# Altium PCB 日全世界.PcbDoc
Units mil, origin at the board's own origin, x right, y up, seen from the top; angles counter-clockwise.
Board outline 1906 x 1421 mil, 2 copper layers (Top Layer, Bottom Layer); 48 components, 40 nets, 175 pads, 45 vias.
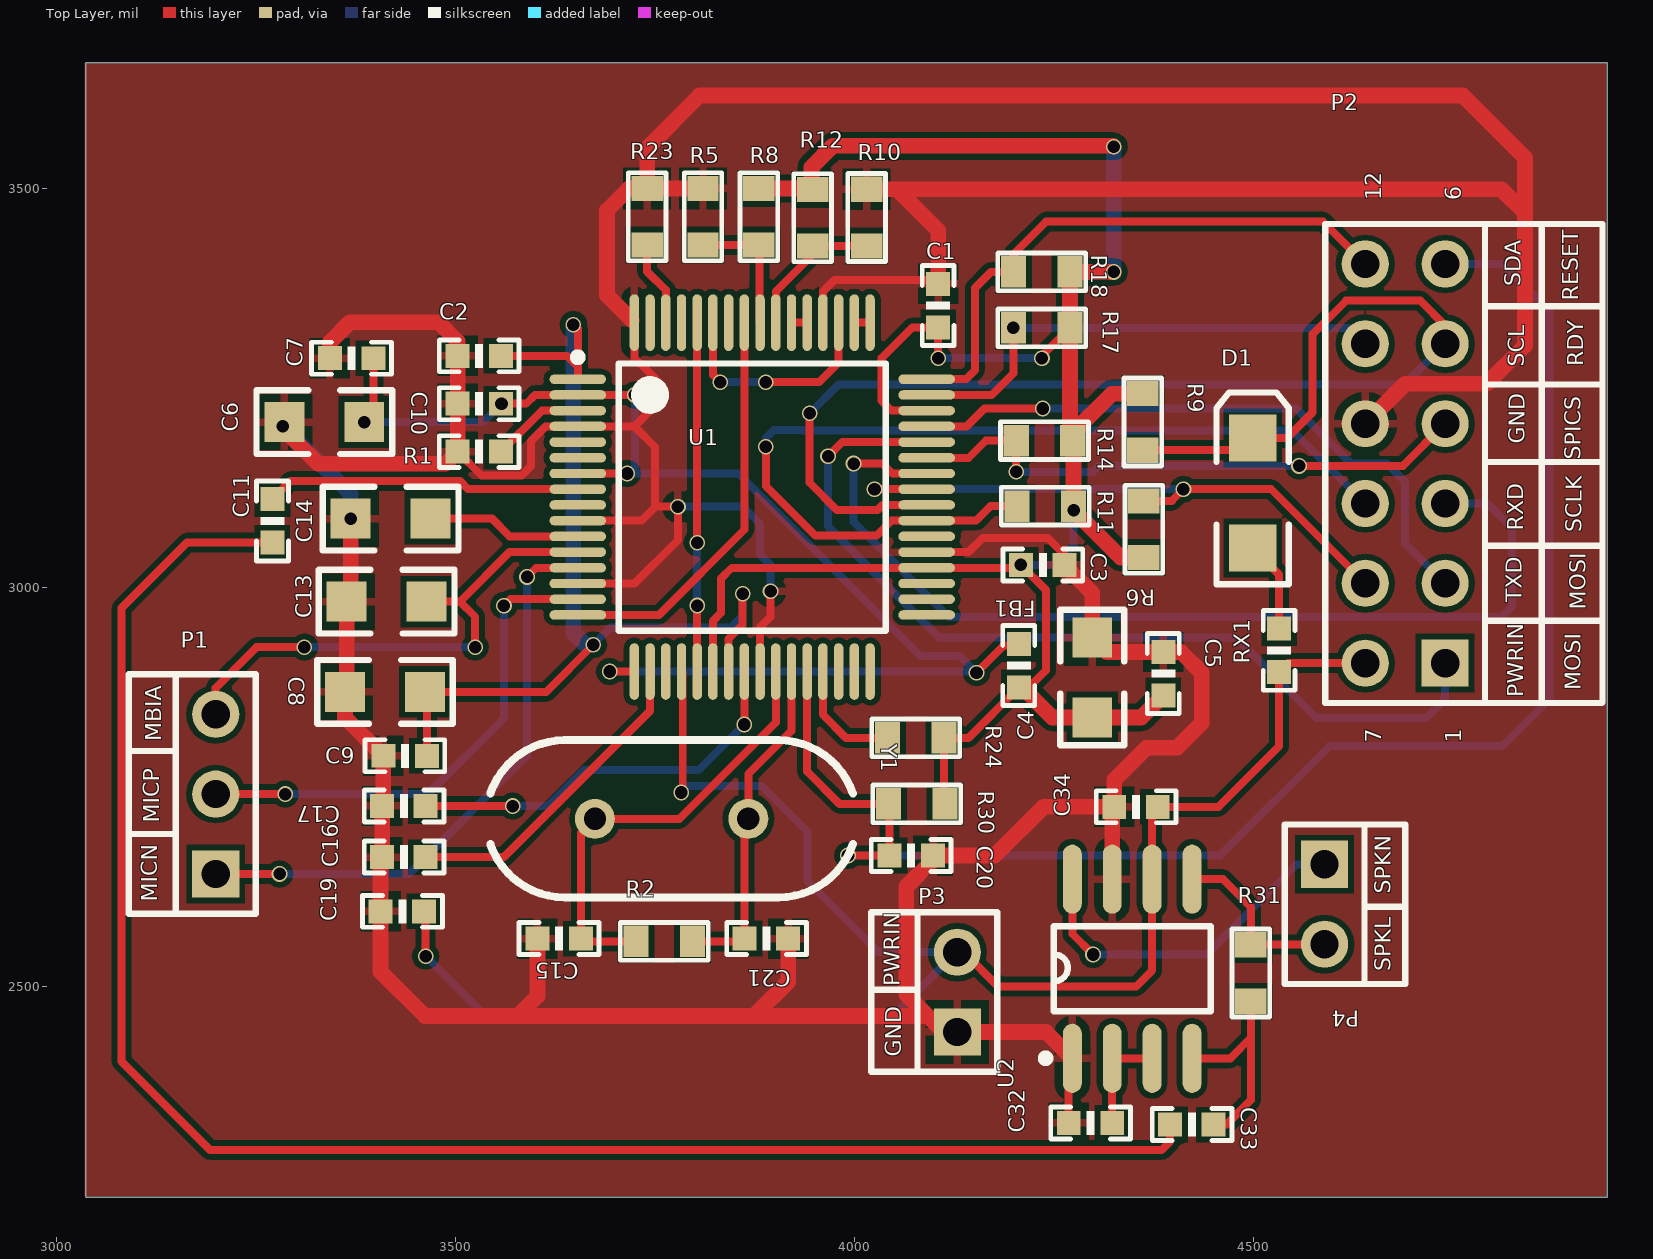
[diagram p0: Top Layer view]
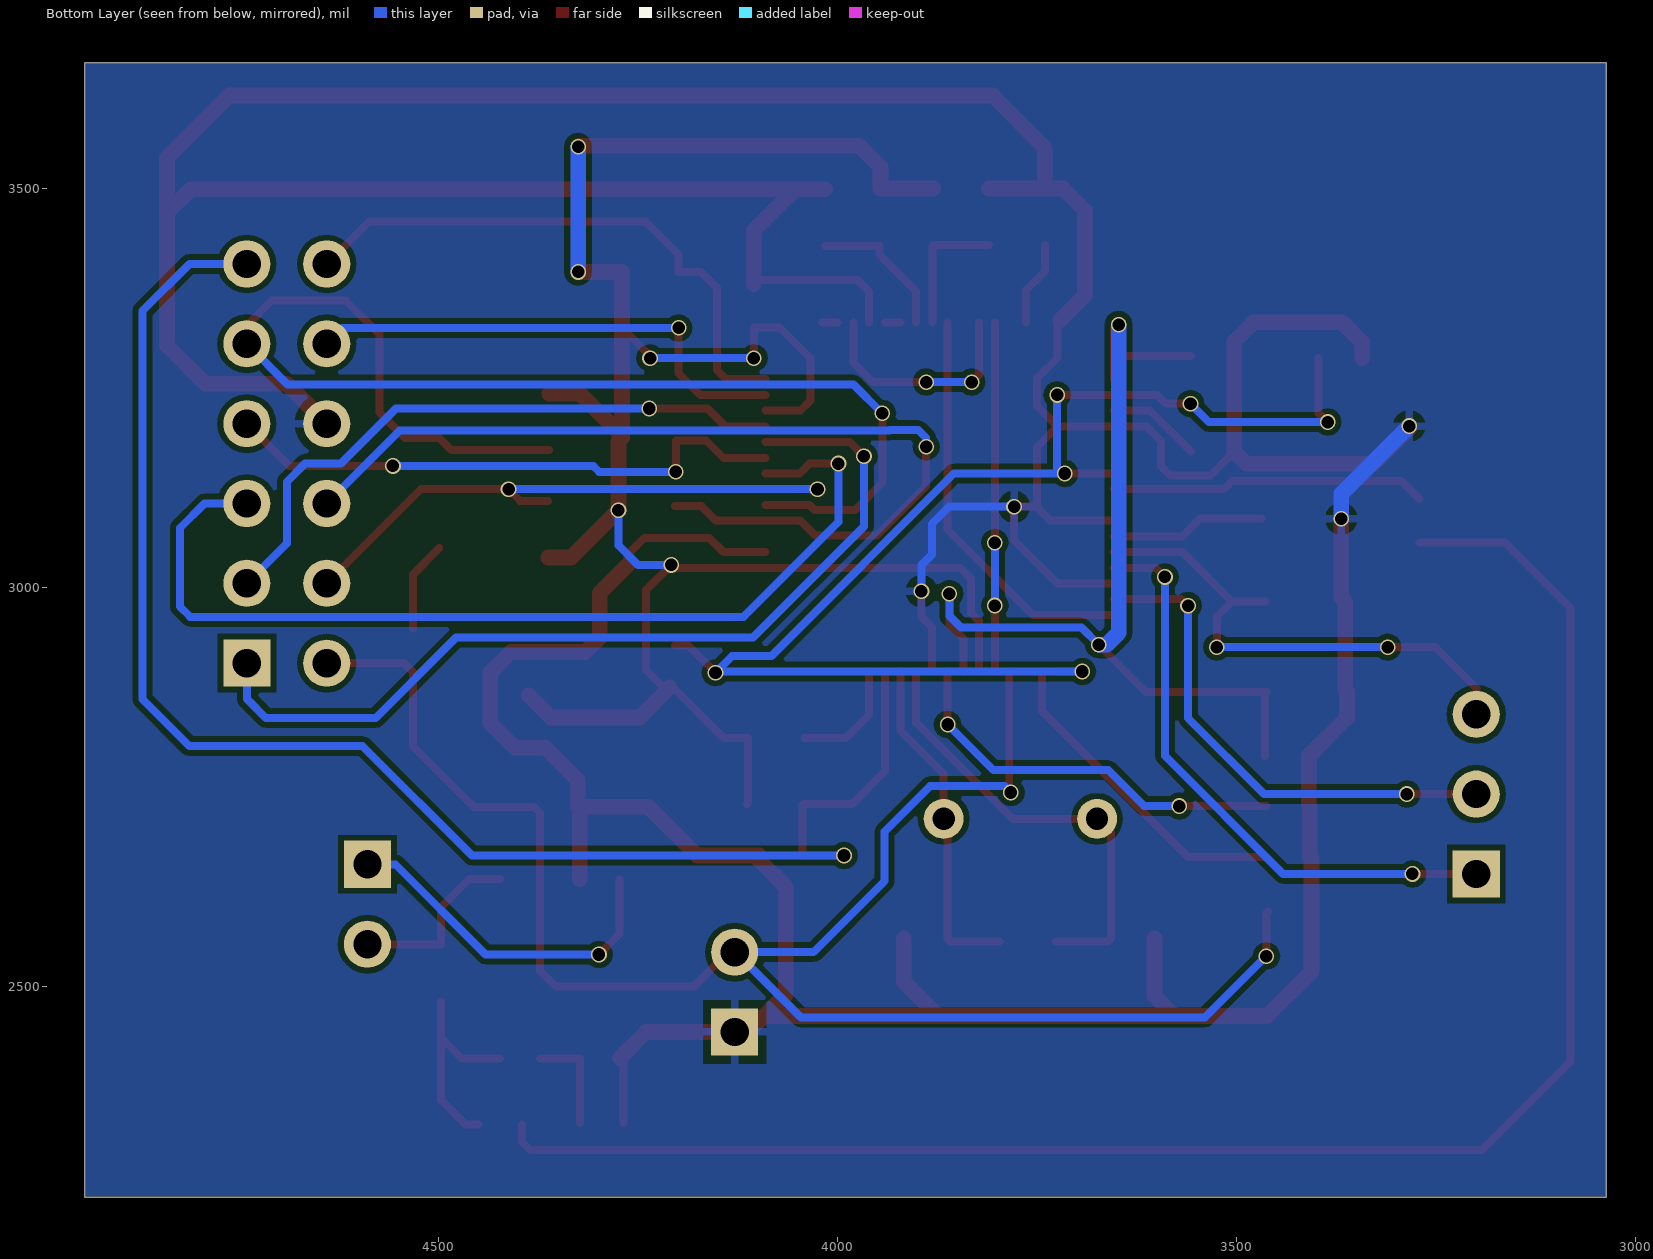
[diagram p1: Bottom Layer view, seen from below]

## Layer stack, top to bottom
Top Layer: signal copper 1.4
Dielectric: dielectric 12.6, FR-4, Dk 4.8
Bottom Layer: signal copper 1.4

## Board outline
3037,2236 3037,3657 4943,3657 4943,2236

## Design rules (kind name [scope] priority, off if disabled: settings)
Clearance [All] p1: gap=7
HoleToHoleClearance [All] p1: gap=5 allowstackedmicrovias=TRUE
MinimumSolderMaskSliver [All] p1: minsoldermaskwidth=5
PolygonConnect [All] p1: connectstyle=Relief reliefconductorwidth=10 reliefentries=4 polygonreliefangle="90 Angle" airgapwidth=10
RoutingVias [All] p1: holewidth=28 width=50 viastyle="Through Hole" minholewidth=11.81 minwidth=19.68 maxholewidth=28 maxwidth=50
SilkToSilkClearance [All] p1: silktosilkclearance=5
SolderMaskExpansion [All] p1: expansion=4
Width [All] p1: maxlimit=78.74 minlimit=10 preferedwidth=10
25 further rules are at their usual default settings.

## Components (designator, comment, footprint, x,y, rotation, side; value= is the part's Value field where it differs from the comment)
C1 "0.1uF" 0603P 4105,3353 r270 top
C2 "0.1uF" 0603P 3530,3290 r0 top
C3 "0.1uF" 0603P 4236,3028 r180 top
C4 "10uF" 0805 4298,2887 r90 top
C5 "0.1uF" 0603P 4387,2892 r270 top
C6 "10uF" 0805 3336,3207 r180 top
C7 "0.1uF" 0603P 3370,3287 r0 top
C8 "10uF" 0805 3412,2869 r180 top
C9 "0.1uF" 0603P 3437,2789 r0 top
C10 "0.1uF" 0603P 3530,3230 r0 top
C11 "1uF" 0603P 3271,3083 r90 top
C13 "10uF" 0805 3414,2982 r180 top
C14 "10uF" 0805 3419,3086 r180 top
C15 "27pF" 0603P 3630,2560 r0 top
C16 "0.1uF" 0603P 3436,2662 r180 top
C17 "1uF" 0603P 3436,2726 r180 top
C19 "0.1uF" 0603P 3434,2594 r180 top
C20 "10uF" 0603P 4071,2664 r0 top
C21 "27pF" 0603P 3890,2560 r180 top
C32 "105" 0603P 4296,2329 r180 top
C33 "104" 0603P 4423,2327 r180 top
C34 "104" 0603P 4353,2725 r180 top
D1 "LED2" 3.2X1.6X1.1 4499,3118 r90 top
FB1 "100M/600R" 0603P 4206,2902 r270 top
P1 "Header 3" HDR1X3 3200,2641 r90 top
P2 "Header 6X2A" HDR2X6_CEN 4740,2905 r90 top
P3 "Header 2" HDR1X2 4129,2443 r90 top
P4 "Header 2" HDR1X2 4589,2653 r270 top
R1 "10K" 0603P 3530,3170 r0 top
R2 "4.7M" R0603 3815,2580 r0 top
R5 "10K" R0603 3834,3411 r270 top
R6 "10K" R0603 4339,3126 r90 top
R8 "10K" R0603 3904,3411 r270 top
R9 "10K" R0603 4385,3154 r270 top
R10 "10K" R0603 4039,3410 r270 top
R11 "10K" R0603 4186,3078 r180 top
R12 "10K" R0603 3924,3516 r90 top
R14 "10K" R0603 4185,3160 r180 top
R17 "10K" R0603 4181.42,3301.38 r180 top
R18 "10K" R0603 4181.42,3371.38 r180 top
R23 "10K" R0603 3764,3411 r270 top
R24 "10K" R0603 4130,2835 r0 top
R30 "10K" R0603 4025,2705 r180 top
R31 "22K" R0603 4473,2570 r90 top
RX1 "1K" 0603P 4532,2921 r90 top
U1 "XFS5152CE" LQFP64_N 3872,3113 r0 top
U2 "HXJ8002" SOP-8 4273,2410 r90 top
Y1 "12M" XTAL_US 3675,2710 r0 top

## Footprints (in the part's own frame and the unit in brackets; to place one, negate y for a bottom-side part, rotate by r counter-clockwise, add the part's x,y. Pads: shape width x height; smd on the part's side, far side on the other; paste and mask are expansions set on the pad)
3.2X1.6X1.1 [mm] "SMT LED; 2 Flat Leads"
  rect 1.5x1.5 smd: 1(-1.75,0) 2(1.75,0)
  silkscreen extent -2.9,-1.15 3.2,1.15
0603P [mil]
  rect 30x30 smd: 1(-27,0) 2(27.5,-0.06)
  silkscreen extent -50,-20 50,20
0805 [mil]
  rect 50x50 smd: 1(-50,0) 2(50,0)
  silkscreen extent -85,-40 85,40
HDR1X2 [mm] "Connector; Header; 2 Position"
  rect 1.5x1.5 hole 0.9: 1(0,0)
  round 1.5 hole 0.9: 2(2.54,0)
  silkscreen extent -1.27,-1.27 3.81,1.27
HDR1X3 [mm] "Connector; Header; 3 Position"
  rect 1.5x1.5 hole 0.9: 1(0,0)
  round 1.5 hole 0.9: 2(2.54,0) 3(5.08,0)
  silkscreen extent -1.27,-1.27 6.35,1.27
HDR2X6_CEN [mm] "Connector; Header; 6x2 Position"
  rect 1.5x1.5 hole 0.9: 1(0,0)
  round 1.5 hole 0.9: 2(2.54,0) 3(5.08,0) 4(7.62,0) 5(10.16,0) 6(12.7,0) 7(0,2.54) 8(2.54,2.54) 9(5.08,2.54) 10(7.62,2.54) 11(10.16,2.54) 12(12.7,2.54)
  silkscreen extent -1.27,-1.27 13.97,3.81
LQFP64_N [mm] "Thin QFP, 64-Leads, Body 10x10mm, Pitch 0.5mm, IPC Medium Density"
  oval 1.8x0.3 smd: 1(-5.55,3.75) 2(-5.55,3.25) 3(-5.55,2.75) 4(-5.55,2.25) 5(-5.55,1.75) 6(-5.55,1.25) 7(-5.55,0.75) 8(-5.55,0.25) 9(-5.55,-0.25) 10(-5.55,-0.75) 11(-5.55,-1.25) 12(-5.55,-1.75) 13(-5.55,-2.25) 14(-5.55,-2.75) 15(-5.55,-3.25) 16(-5.55,-3.75) 33(5.55,-3.75) 34(5.55,-3.25) 35(5.55,-2.75) 36(5.55,-2.25) 37(5.55,-1.75) 38(5.55,-1.25) 39(5.55,-0.75) 40(5.55,-0.25) 41(5.55,0.25) 42(5.55,0.75) 43(5.55,1.25) 44(5.55,1.75) 45(5.55,2.25) 46(5.55,2.75) 47(5.55,3.25) 48(5.55,3.75)
  oval 0.3x1.8 smd: 17(-3.75,-5.55) 18(-3.25,-5.55) 19(-2.75,-5.55) 20(-2.25,-5.55) 21(-1.75,-5.55) 22(-1.25,-5.55) 23(-0.75,-5.55) 24(-0.25,-5.55) 25(0.25,-5.55) 26(0.75,-5.55) 27(1.25,-5.55) 28(1.75,-5.55) 29(2.25,-5.55) 30(2.75,-5.55) 31(3.25,-5.55) 32(3.75,-5.55) 49(3.75,5.55) 50(3.25,5.55) 51(2.75,5.55) 52(2.25,5.55) 53(1.75,5.55) 54(1.25,5.55) 55(0.75,5.55) 56(0.25,5.55) 57(-0.25,5.55) 58(-0.75,5.55) 59(-1.25,5.55) 60(-1.75,5.55) 61(-2.25,5.55) 62(-2.75,5.55) 63(-3.25,5.55) 64(-3.75,5.55)
  silkscreen extent -5.67,-4.25 4.25,4.57, body extent -5,-5 5,5, height 1.6
R0603 [mm]
  rect 0.8x1 smd: 1(-2.25,-0.6) 2(-0.45,-0.6)
  silkscreen extent -2.75,-1.2 0.05,0
SOP-8 [mm]
  oval 2.2x0.6 smd: 1(0,0) 2(0,-1.27) 3(0,-2.54) 4(0,-3.81) 5(5.7,-3.81) 6(5.7,-2.54) 7(5.7,-1.27) 8(5.7,0)
  silkscreen extent -0.12,-4.41 4.2,0.97
XTAL_US [mil]
  round 50 hole 28: 1(0,0) 2(192.13,0)
  silkscreen extent -131,-98 323,98

## Part data
C1 C2 C3 C5 C7 C9 C10 C11 C15 C21 C32 C33 C34: library part "Cap NP", "电容"
C4 C6 C8 C13 C14 C20: library part "CAP POL"
C16 C17 C19: library part CAP, "Capacitor"
D1: "Typical RED, GREEN, YELLOW, AMBER GaAs LED"
FB1: library part Fbead, "磁珠"
P1: "Header, 3-Pin"
P2: "Header, 6-Pin, Dual row"
P3 P4: "Header, 2-Pin"
R1 R6 R9 R11 R14 R17 R18 R23 R24 R30 R31: library part Res2, "Resistor"
R2 R5 R8 R10 R12: library part RES2, "电阻"
RX1: library part R
U1: library part XFS5152-2
Y1: library part XTAL1, "晶振"

## Via types
v1: diameter 19.68, hole 15.75, Top Layer to Bottom Layer, 45 vias

## Nets (pads, with @x,y where several pads share a name; then routed paths per layer and width w, separated by ;. In a path a pad name is that pad's centre, name@x,y a point inside that pad or via, vN(x,y) a via of type N, cw(c..) or ccw(c..) an arc to the next point about the centre after c; other vN are vias at no path point)
12MI: C15.2 R2.1 U1.26 Y1.1 | length 568.1
  Top Layer w10: R2.1 3661.06,2556.38 C15.2 3657.5,2692.5 Y1.1 3780.89,2710 3901.53,2830.64 U1.26
12MO: C21.2 R2.2 U1.27 Y1.2 | length 425.5
  Top Layer w10: R2.2 3858.81,2556.38 C21.2 3862.5,2705.37 Y1.2 3867.13,2766.13 3921.21,2820.21 U1.27
A3: R23.2 U1.62 | length 106.9
  Top Layer w10: R23.2 3740.38,3395.62 3763.73,3372.27 U1.62
A4: R24.1 U1.29 | length 146.9
  Top Layer w10: U1.29 3960.58,2840.42 3989.62,2811.38 R24.1
ADAC0: C11.1 C33.2 | length 2176.4
  Top Layer w10: C11.1 3164,3056 3082,2974 3082,2406 3193,2295 4385,2295 4395.5,2305.5 C33.2
AVDD12: C17.1 U1.24 | length 507.8
  Top Layer w10: C17.1 v1(3572,2726) ; v1(3862.16,2828.16) U1.24
  Bottom Layer w10: v1(3572,2726) 3616,2726 3661,2771 3805,2771 v1(3862.16,2828.16)
AVDD33: C6.1 C7.2 C10.2 FB1.1 U1.2 U1.7 U1.17 | length 1689.1
  Top Layer w10: v1(3386,3207) 3397.5,3218.5 C7.2 ; C10.2 3588.94,3229.94 3599.95,3240.95 U1.2 v1(3724.95,3240.95) ; U1.7 v1(3715.47,3142.53) ; v1(3693.5,2894.5) U1.17 ; v1(4153,2893) 4187,2927 FB1.1@4204,2927
  Bottom Layer w10: v1(3386,3207) 3535,3207 v1(3558,3230) ; v1(3693.5,2894.5) v1@4151.5,2894.5 ; v1(3715.47,3142.53) 3854.47,3142.53 4083,2914 4132,2914 v1@4151.5,2894.5 ; 3724.95,3146.95 v1(3724.95,3240.95) ; v1(4153,2893) v1@4151.5,2894.5
BAUD1: R5.2 R8.2 U1.56 | length 167.2
  Top Layer w10: R5.2 R8.2 3881.38,3427.72 U1.56@3881.38,3331.97
BAUD2: R10.2 R12.1 U1.55 | length 182.9
  Top Layer w10: U1.55 3901.53,3370.53 3947.62,3416.62 R12.1 4015.08,3427.42 R10.2
D0: U1.16 U1.57 | length 512.2
  Top Layer w10: U1.16 3755.36,2965.36 3862.16,3072.16 U1.57
D1: U1.21 U1.60 | length 438.6
  Top Layer w10: U1.21 v1(3803.1,2977.1) ; v1(3803.1,3055.9) U1.60
  Bottom Layer w10: v1@3802,2976 v1(3803.1,2977.1) v1(3803.1,3055.9)
D2: U1.49 U1.50 | length 19.7
  Top Layer w10: U1.50 U1.49
D3: U1.51 U1.59 | length 291.1
  Top Layer w10: U1.59 3822.79,3266.21 v1(3832,3257) ; v1(3889,3257) 3956,3257 3980.27,3281.27 U1.51
  Bottom Layer w10: v1(3832,3257) v1(3889,3257) v1@3892,3254
GND: C1.1 C2.1 C3.1 C4.2 C5.1 C6.2 C7.1 C8.2 C9.1 C10.1 C13.2 C14.2 C15.1 C16.2 C17.2 C19.2 C20.2 C21.1 C32.2 C34.2 P2.10 P3.1 R1.1 R5.1 R10.1 R23.1 U1.4 U1.10 U1.14 U1.25 U1.37 U1.52 U1.64 U2.1 U2.7 | length 8119.8
  Top Layer w10: R1.1 3533.16,3139.84 3582.84,3139.84 3595,3152 3595,3183.39 3613.19,3201.58 U1.4 3724.42,3201.58 ; U1.14 3724.73,3004.73 3779,3059 v1(3779,3101) 3751,3101 3750,3100 ; U1.10 3733.47,3083.47 3750,3100 ; U1.64 3724.36,3287.64 3750,3262 3750,3227.17 3724.42,3201.58 ; U1.25 3881.84,2949.84 3895,2963 v1(3895,2995) ; U1.52 3960.58,3370.58 3975,3385 4100,3385 C1.1 ; U1.37 4143.1,3044.1 4161,3062 4242,3062 4263,3041 C3.1 ; C32.2 4268.5,2405.5 U2.1 ; 3724.42,3201.58 3750,3176 3750,3100
  Top Layer w19.68: v1(3284,3202) 3284,3199 3328.16,3154.84 3487.84,3154.84 R1.1 C10.1 C2.1 3503,3308 3479,3332 3368,3332 3343,3307 C7.1 ; v1(3369,3086) 3369,2987 C13.2 3364,2871 C8.2 3362,2837 C9.1 3410,2727.56 C17.2 C16.2 3406.5,2660.06 C19.2 3406.5,2518.5 3462,2463 3578,2463 ; C15.1 3603,2488 3578,2463 ; U1.64@3721.3,3334.57 3690,3365.87 3690,3472 3717.58,3499.58 R23.1 ; R5.1 R23.1 ; C21.1 3917,2506 3874,2463 ; R10.1 4053.42,3498.58 ; C1.1 4105,3447 4053.42,3498.58 ; C3.1 4298,2993 C4.2 4316,2919 C5.1 4409,2919 4435,2893 4435,2830 4404,2799 4366,2799 4325.5,2758.5 C34.2 ; U2.1 4240,2443 P3.1 4112,2443 4092,2463 ; U2.7 4323,2722.56 C34.2 ; P2.10 4690,3255 4792,3255 4840,3303 4840,3469 ; 3578,2463 3874,2463 ; R23.1 3740.38,3550.38 3806,3616 4762,3616 4840,3538 4840,3469 ; 3874,2463 4092,2463 ; 4053.42,3498.58 4810.42,3498.58 4840,3469 ; 4092,2463 4065,2490 4065,2625 4098.5,2658.5 C20.2 4175.94,2663.94 4237.06,2725.06 C34.2
  Bottom Layer w10: v1(3779,3101) 3860.38,3101 3881.84,3079.53 3881.84,3041.16 3895,3028 v1(3895,2995)
  Bottom Layer w19.68: v1(3284,3202) 3369,3117 v1(3369,3086)
IIC_SCL: P2.11 R17.2 U1.47 | length 625.9
  Top Layer w10: U1.47 4171.95,3240.95 4199.13,3268.13 v1(4199.13,3325)
  Bottom Layer w10: v1(4199.13,3325) 4620,3325 P2.11
IIC_SDA: P2.12 R18.2 U1.48 | length 726.5
  Top Layer w10: U1.48 4139.64,3260.64 4151,3272 4151,3375 4171,3395 R18.2 4199.13,3417.13 4240,3458 4587,3458 P2.12
MIC_BIAS: C13.1 P1.3 U1.12 | length 659.2
  Top Layer w10: P1.3 3200,2874 3251,2925 v1(3311,2925) ; C13.1 3506,2982 ; v1(3525,2925) 3525,2963 3506,2982 ; U1.12 3568.1,3044.1 3506,2982
  Bottom Layer w10: v1(3311,2925) v1(3525,2925)
MIC_N: P1.1 U1.13 | length 743.5
  Top Layer w10: P1.1 v1(3280,2641) ; v1(3590,3013) 3601.42,3024.42 U1.13
  Bottom Layer w10: v1(3280,2641) 3442,2641 3590,2789 v1(3590,3013)
MIC_P: P1.2 U1.15 | length 637.2
  Top Layer w10: P1.2 v1(3287,2741) ; v1(3561,2977) 3569.05,2985.05 U1.15
  Bottom Layer w10: v1(3287,2741) 3466,2741 3561,2836 v1(3561,2977)
NetC11_2: C11.2 U1.8 | length 396
  Top Layer w10: C11.2 3293.56,3133 3506,3133 3516.16,3122.84 U1.8
NetC14_1: C14.1 U1.11 | length 193.7
  Top Layer w10: C14.1 3546,3086 3568.21,3063.79 U1.11
NetC32_1: C32.1 U2.2 U2.3 | length 131
  Top Layer w10: C32.1 U2.2 U2.3
NetC33_1: C33.1 R31.1 U2.4 | length 267.3
  Top Layer w10: U2.4 4471,2410 4496.62,2435.62 ; C33.1 4466,2327 4496.62,2357.62 4496.62,2435.62 ; R31.1 4496.62,2435.62
NetD1_1: D1.1 RX1.2 | length 114.3
  Top Layer w10: D1.1 4532.06,3016.04 RX1.2
NetR1_2: R1.2 U1.3 | length 117.3
  Top Layer w10: R1.2 3608.83,3221.27 U1.3
NetU1_53: U1.53 U1.54 | length 19.7
  Top Layer w10: U1.54 U1.53
PWR_IN: C19.1 C34.1 P2.7 P3.2 RX1.1 U1.20 U2.6 | length 2279.5
  Top Layer w10: C19.1 3463,2592 v1(3463,2538) ; v1(3783,2743) 3785,2745 3785,2892.91 U1.20 ; P3.2 4137,2543 4180,2500 4353,2500 4373,2520 U2.6 4373,2718 C34.1 4456,2725 4532,2801 RX1.1 4543,2905 P2.7
  Bottom Layer w10: v1(3463,2538) 3540,2461 4046,2461 P3.2@4128,2543 ; v1(3783,2743) 3791,2751 3884,2751 3941,2694 3941,2632 4030,2543 P3.2@4128,2543 ; P3.2 P3.2@4128,2543
RDY: D1.2 P2.5 R9.2 U1.40 | length 1631.6
  Top Layer w10: v1(3944,3218) 3944,3131 3978,3097 4029,3097 4035.16,3103.16 U1.40 ; R9.2 4483.82,3171.72 D1.2 4541.9,3186.9 4574,3219 4574,3317 4616,3359 4709,3359 4740,3328 P2.5
  Bottom Layer w10: v1(3944,3218) 3980,3254 4689,3254 P2.5
RESET: C20.1 P2.6 R30.2 U1.28 | length 1962.8
  Top Layer w10: U1.28 3940.9,2769.1 3981.38,2728.62 R30.2 4044,2727.34 C20.1 v1(3992,2664)
  Bottom Layer w10: v1(3992,2664) 4458,2664 4595,2801 4812,2801 4871,2860 4871,3346 4812,3405 P2.6
RXD: P2.9 R11.2 U1.39 | length 1208.8
  Top Layer w10: v1(3889,3176) 3889,3127 3951,3065 4028,3065 4046.47,3083.47 U1.39 4152.47,3083.47 4170.62,3101.62 R11.2
  Bottom Layer w10: v1(3889,3176) 3889,3187 3899,3197 3934.11,3197 3934.95,3196.16 4548.84,3196.16 P2.9
SPI_CLK: P2.3 U1.42 | length 1244.2
  Top Layer w10: v1(3999,3155) 4035,3155 4047.47,3142.53 U1.42
  Bottom Layer w10: v1(3999,3155) 3999,3082 4118,2963 4811,2963 4824,2976 4824,3074 4793,3105 P2.3
SPI_CS: P2.4 R14.2 U1.43 | length 722.3
  Top Layer w10: U1.43 4143.21,3162.21 4164.62,3183.62 R14.2 v1(4202.72,3144.69) ; v1(4557,3152) 4687,3152 P2.4
  Bottom Layer w10: v1(4202.72,3144.69) 4298.69,3144.69 4306,3152 v1(4557,3152)
SPI_MISO: P2.2 U1.45 | length 794.6
  Top Layer w10: U1.45 4140.58,3201.58 4162.95,3223.95 v1(4235.95,3223.95)
  Bottom Layer w10: v1(4235.95,3223.95) 4553.05,3223.95 4622,3155 4667,3155 4690,3132 4690,3055 P2.2
SPI_MOSI: P2.1 U1.44 | length 1146.3
  Top Layer w10: v1(3967,3164) 3984.9,3181.9 U1.44
  Bottom Layer w10: v1(3967,3164) 3967,3076 4106,2937 4478,2937 4579,2836 4716,2836 4740,2860 P2.1
SPKL: P4.2 R31.2 U2.5 | length 226.9
  Top Layer w10: U2.5 4461.59,2634.41 4496.62,2599.38 R31.2 P4.2@4588.28,2552.28
SPKN: P4.1 U2.8 | length 442
  Top Layer w10: U2.8 4273,2566 v1(4299,2540)
  Bottom Layer w10: v1(4299,2540) 4441,2540 4554,2653 P4.1
TXD: P2.8 R6.2 U1.41 | length 784.6
  Top Layer w10: v1(4025.16,3122.84) U1.41 ; R6.2 4397.6,3108.28 v1(4412.16,3122.84) 4522.16,3122.84 P2.8
  Bottom Layer w10: v1(4025.16,3122.84) v1(4412.16,3122.84)
VDD12: C2.2 C8.1 C9.2 U1.1 U1.23 | length 1240.6
  Top Layer w10: C9.2 3464.5,2866.5 C8.1 3614,2869 v1(3673,2928) ; C2.2 3640.06,3289.94 3653.5,3276.5 ; v1(3648,3329) 3653.5,3323.5 3653.5,3276.5 ; U1.1 3653.5,3276.5 ; U1.23 3842.47,2935.47 3860,2953 v1(3860,2992)
  Bottom Layer w10: v1(3673,2928) 3694.53,2949.53 3845.53,2949.53 3860,2964 v1(3860,2992)
  Bottom Layer w19.68: v1(3648,3329) 3648,2943 3663,2928 v1(3673,2928)
VDD33: C1.2 C3.2 C4.1 C5.2 FB1.2 R6.1 R8.1 R9.1 R11.1 R12.2 R14.1 R17.1 R18.1 R24.2 R30.1 U1.22 U1.36 U1.46 | length 2866.3
  Top Layer w10: U1.22 3822.79,2957.79 3833,2968 3833,3011 3846.42,3024.42 U1.36 4204.85,3024.42 v1(4208.5,3028.06) 4240,2996.56 4240,2896 4218.5,2874.5 4210.5,2874.5 FB1.2 4142.81,2811.38 R24.2 4112.28,2729.92 R30.1 ; U1.46 4046.73,3221.27 4034,3234 4034,3287 4072.5,3325.5 C1.2 v1(4104.94,3287.06) ; v1(4234.94,3287.06) 4234.94,3289.94 R17.1
  Top Layer w19.68: R8.1 3946.32,3499.58 3946.32,3526.32 3973,3553 4324,3553 v1(4325,3552) ; FB1.2@4210.5,2874.5 4248,2837 C4.1 4359.44,2837 C5.2 ; v1(4325,3395) R18.1 R17.1 4270,3187.2 R14.1 ; R9.1 4322.58,3242.58 4273.58,3193.58 R14.1 ; R6.1 4333.58,3037.42 v1(4274.58,3096.42) R11.1 4274.58,3182.62 R14.1
  Bottom Layer w10: v1(4104.94,3287.06) v1(4234.94,3287.06) ; v1(4208.5,3028.06) 4250.06,3028.06 4274.58,3052.58 v1(4274.58,3096.42)
  Bottom Layer w19.68: v1(4325,3395) v1(4325,3552)
VREF: C16.1 U1.18 | length 406.3
  Top Layer w10: C16.1 3561,2662 3744.05,2845.05 U1.18
pads on no net: U1.5 U1.6 U1.9 U1.19 U1.30 U1.31 U1.32 U1.33 U1.34 U1.35 U1.38 U1.58 U1.61 U1.63

## Polygon pours and split planes (outlines as drawn)
GND on Bottom Layer "Bottom Layer-No Net" (solid, remove dead copper, pour order 4): 3037,3656 4942,3656 4942,2238 3037,2238 3037,3656
GND on Top Layer "Bottom Layer-No Net" (solid, remove dead copper, pour order 3): 3036,3656 4941,3656 4941,2238 3036,2238 3036,3656

## Silkscreen, mask and mechanical layers (free items; w line width, h text height)
Top Overlay:
  lines w7.87: 3091,2591 3150,2591 ; 3091,2594 3091,2891 3150,2891 ; 3091,2795 3150,2795 ; 3092,2691 3150,2691 ; 4021,2496 4079,2496 ; 4079,2393 4021,2393 4021,2593 4079,2593 ; 4639,2503 4690,2503 4690,2703 4639,2703 ; 4639,2600 4689,2600 ; 4790,2855 4936,2855 ; 4790,2958 4936,2958 ; 4790,3052 4936,3052 ; 4790,3157 4936,3157 ; 4790,3254 4936,3254 ; 4790,3352 4936,3352 ; 4790,3455 4937,3455 4937,2856 ; 4861,2857 4861,3455
  text "SDA" at 4835,3377 h20 r90
  text "RESET" at 4907,3359 h20 r90
  text "RDY" at 4913,3277 h20 r90
  text "SCL" at 4839,3276 h20 r90
  text "GND" at 4840,3180 h20 r90
  text "SPICS" at 4910,3160 h20 r90
  text "RXD" at 4838,3071 h20 r90
  text "SCLK" at 4911,3069 h20 r90
  text "TXD" at 4836,2981 h20 r90
  text "MOSI" at 4916,2972 h20 r90
  text "MOSI" at 4910,2871 h20 r90
  text "PWRIN" at 4838,2862 h20 r90
  text "MBIA" at 3132,2807 h20 r90
  text "MICP" at 3129,2705 h20 r90
  text "SPKN" at 4672,2616 h20 r90
  text "MICN" at 3127,2606 h20 r90
  text "SPKL" at 4672,2519 h20 r90
  text "PWRIN" at 4057,2500 h20 r90
  text "GND" at 4059,2412 h20 r90
Mechanical 1:
  the board outline again, w10

## Text inside footprints (layer, text, board x,y; h text height)
P2: Top Overlay "7" at 4660,2805 h20 r90; Top Overlay "1" at 4760,2805 h20 r90; Top Overlay "6" at 4760,3485 h20 r90; Top Overlay "12" at 4660,3485 h20 r90